# Altium PCB DVD.PcbDoc (part 2 of 2)
Units mm, origin at the board's own origin, x right, y up, seen from the top; angles counter-clockwise.
Board outline 60 x 90 mm, 2 copper layers (Top Layer, Bottom Layer), stack 1.671 mm thick; 69 components, 43 nets, 255 pads, 31 vias.
Unrouted connection lines stored in the file: 70.
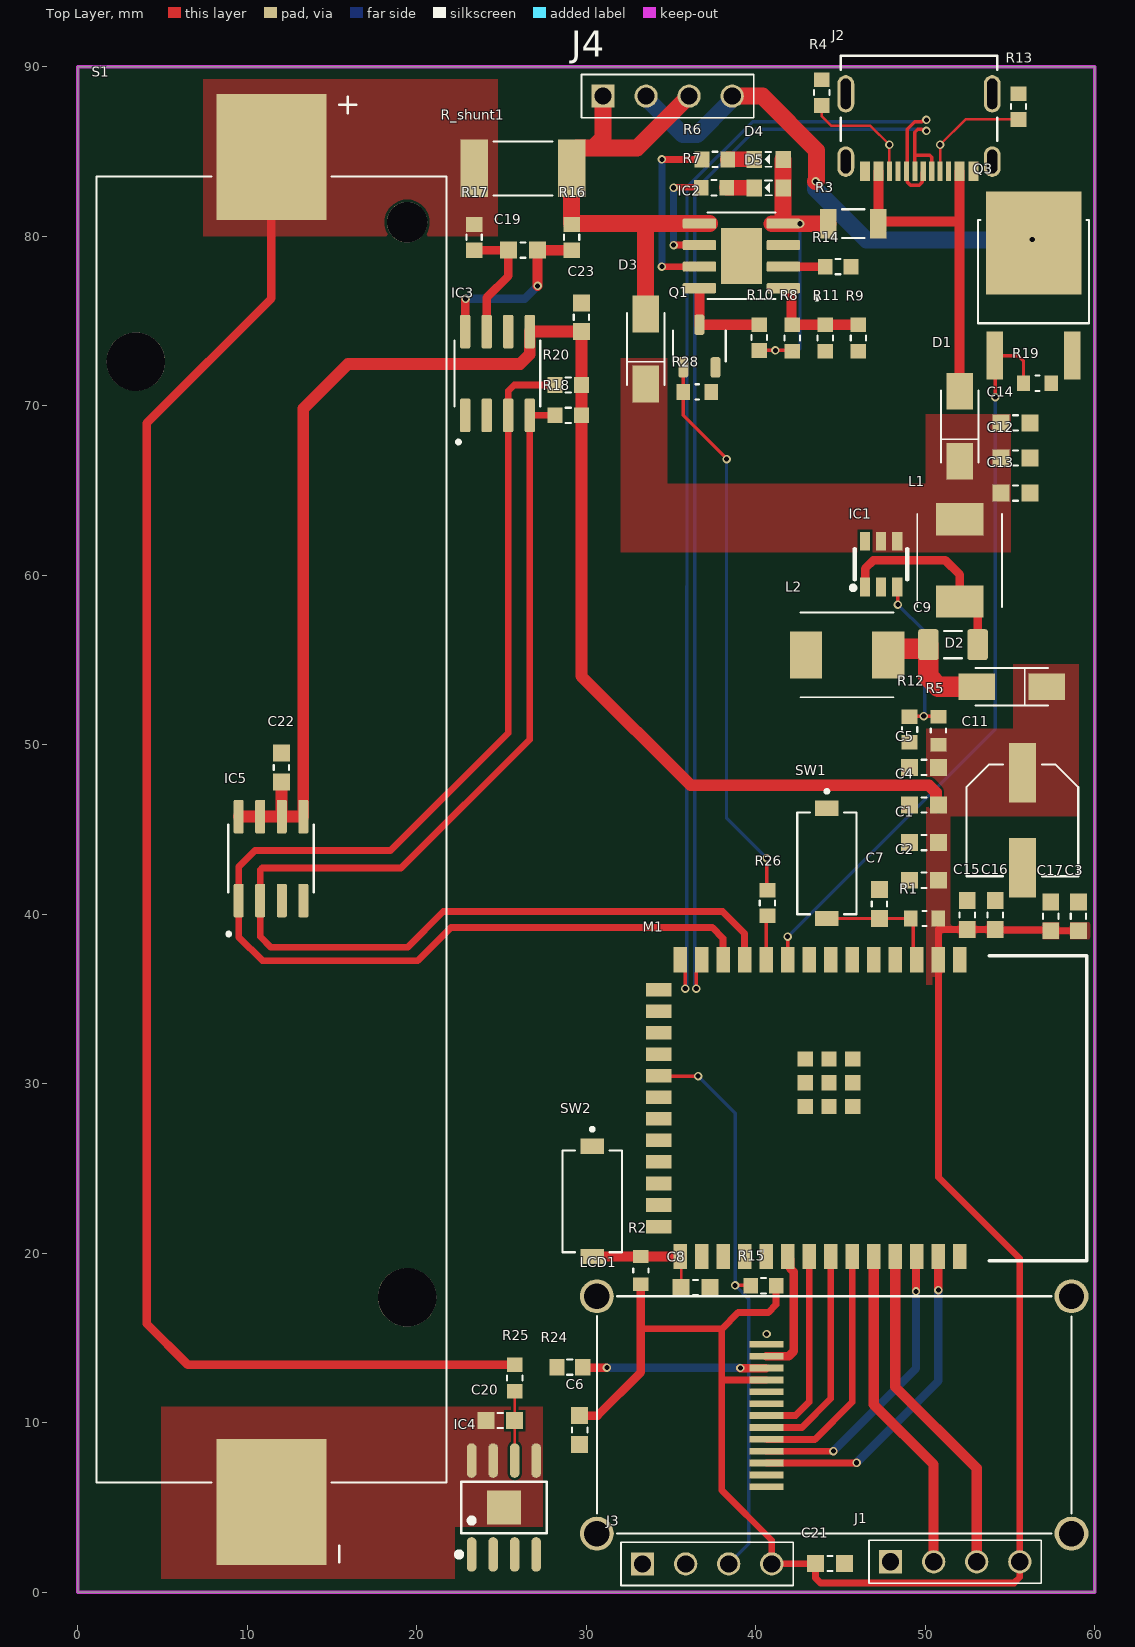
[diagram p0: Top Layer view]

## Part data (continued)
IC5: library part LM75BIM-5+, "Serial Switch/Digital Sensor, 9 Bit(s), 3Cel, CMOS, Rectangular, 8 Pin, Surface Mount", Case/Package=SOIC, Manufacturer="Analog Devices", Manufacturer Lifecycle Status=PRODUCTION, Max Operating Temperature=125°C, Max Power Dissipation=362mW, Max Supply Voltage (DC)=5.5V, Min Operating Temperature=-55°C, Min Supply Voltage (DC)=3V, Operating Supply Current=250µA, Supplier Part Number=LM75BIM-5+-ND, Category="Analog to Digital Converters (ADCs)", ComponentLink1Description=https://octopart.com:443/opatz8j6/c1?t=YplwzHpL-JJLZ_2PRGZZpt756W2xclSjhqXVdEI1uhJ8_WWjbW7-qgeHxwwe1SMULagSLc6USHzl8XuhBHjwSqYk79nBn7LCkVwL1rbbeliDkJ86ulnC6U38m-iQo5pASL4W__81O9e-gp7BJ4jJNYdroiH1YY2DGBMiO5DTDljEwD1jx41NO8_GGUihyPQS3uA_NDDyM9lvT6sjnkswLspbyI9HgaQ2_Ebdp7nvrIldeSGWyNMVZ3D6ks0QZS_VIIbeN8gOxfe-OAINvbqiAbKFlkIsyC7EpES6idiquEIaQjTaF9N-&src-supplier=Analog+Devices, ComponentLink1URL=https://octopart.com:443/opatz8j6/c1?t=YplwzHpL-JJLZ_2PRGZZpt756W2xclSjhqXVdEI1uhJ8_WWjbW7-qgeHxwwe1SMULagSLc6USHzl8XuhBHjwSqYk79nBn7LCkVwL1rbbeliDkJ86ulnC6U38m-iQo5pASL4W__81O9e-gp7BJ4jJNYdroiH1YY2DGBMiO5DTDljEwD1jx41NO8_GGUihyPQS3uA_NDDyM9lvT6sjnkswLspbyI9HgaQ2_Ebdp7nvrIldeSGWyNMVZ3D6ks0QZS_VIIbeN8gOxfe-OAINvbqiAbKFlkIsyC7EpES6idiquEIaQjTaF9N-&src-supplier=Analog+Devices, ComponentLink2Description=https://datasheet.octopart.com:443/LM75BIM-5%2B-Analog-Devices-datasheet-13733767.pdf?src-supplier=Ciiva, ComponentLink2URL=https://datasheet.octopart.com:443/LM75BIM-5%2B-Analog-Devices-datasheet-13733767.pdf?src-supplier=Ciiva, ComponentLink3Description=https://datasheet.octopart.com:443/LM75BIM-5%2B-Maxim-Integrated-datasheet-15933229.pdf?src-supplier=iiiC, ComponentLink3URL=https://datasheet.octopart.com:443/LM75BIM-5%2B-Maxim-Integrated-datasheet-15933229.pdf?src-supplier=iiiC, ComponentLink4Description=http://sigma.octopart.com:80/conflict_mineral_statement/Analog-Devices-company-33.pdf?src-supplier=Compliance+Statements, ComponentLink4URL=http://sigma.octopart.com:80/conflict_mineral_statement/Analog-Devices-company-33.pdf?src-supplier=Compliance+Statements, ComponentLink5Description=http://sigma.octopart.com:80/conflict_mineral_statement/Maxim-Integrated-company-65.pdf?src-supplier=Compliance+Statements, ComponentLink5URL=http://sigma.octopart.com:80/conflict_mineral_statement/Maxim-Integrated-company-65.pdf?src-supplier=Compliance+Statements, ComponentLink6Description=http://sigma.octopart.com:80/rohs_statement/Maxim-Integrated-company-66.pdf?src-supplier=Compliance+Statements, ComponentLink6URL=http://sigma.octopart.com:80/rohs_statement/Maxim-Integrated-company-66.pdf?src-supplier=Compliance+Statements, ComponentLink7Description=http://sigma.octopart.com:80/reach_statement/Maxim-Integrated-company-67.pdf?src-supplier=Compliance+Statements, ComponentLink7URL=http://sigma.octopart.com:80/reach_statement/Maxim-Integrated-company-67.pdf?src-supplier=Compliance+Statements, ComponentLink8Description=https://octopart.com:443/opatz8j6/c1?t=ANtBRCTaBdtvFyyuZNnEn44Ck4f0UNpo50vn_fQhfGrZ59IDdhfu2ipHRvQpLfcdo1pyCKCFJPWk8CxqPV5Go2Xy1MfrovsCR3DXvT7Gfy6JiDcwYz5R0lqVBT-d2HzchyXqrl0saZY6dsynHRKtZ8QolJYoY7wiWroMt77lbe_02i5Y6VAS4-QMQDFKJbGEtMk7trPgfBWZ1D3DU1KUo3jjNBd1KbG_03mihrdCH2VC6x6bVQtR-W63Ky_GYcKqaIEub4rG6TBSiLYzydBblAOC-QtCYgUJ-e1WKK81SMDSa7kogVs_&src-supplier=Compliance+Statements, ComponentLink8URL=https://octopart.com:443/opatz8j6/c1?t=ANtBRCTaBdtvFyyuZNnEn44Ck4f0UNpo50vn_fQhfGrZ59IDdhfu2ipHRvQpLfcdo1pyCKCFJPWk8CxqPV5Go2Xy1MfrovsCR3DXvT7Gfy6JiDcwYz5R0lqVBT-d2HzchyXqrl0saZY6dsynHRKtZ8QolJYoY7wiWroMt77lbe_02i5Y6VAS4-QMQDFKJbGEtMk7trPgfBWZ1D3DU1KUo3jjNBd1KbG_03mihrdCH2VC6x6bVQtR-W63Ky_GYcKqaIEub4rG6TBSiLYzydBblAOC-QtCYgUJ-e1WKK81SMDSa7kogVs_&src-supplier=Compliance+Statements, Interface="2-Wire, I2C, SMBus, Serial", Lifecycle Status=Production, Manufacturer Part Number=LM75BIM-5+, Mounting Technology="Surface Mount", Operating Supply Voltage=5.5V, Output Type="Digital, I2C", Pins=8, Pricing="1=2.67, 5=2.382, 10=2.274, 25=2.1452, 50=2.057, 100=1.9762, 500=1.81372, 1000=1.75322, 5000=1.63137 (USD)", Radiation Hardening=No, Resolution=1.125B, RoHS=Compliant, Stock=277, Supplier=DigiKey
J1 J3 J4: library part "HEADER; 4PIN; 2.54; VER; TSW-104-14-L-S", "Conn Unshrouded Header HDR 4 POS 2.54mm Solder ST Thru-Hole Automotive Bulk", Manufacturer=Samtec, Manufacturer Part Number=TSW-104-14-L-S, Supplier Part Number=SAM1055-04-ND, Category=Connectors, ComponentLink1Description=https://datasheet.ciiva.com/25618/0900766b81154476-25618487.pdf?src-supplier=Rs, ComponentLink1URL=https://datasheet.ciiva.com/25618/0900766b81154476-25618487.pdf?src-supplier=Rs, ComponentLink2Description=https://datasheet.ciiva.com/10190/htsw-th-10190703.pdf?src-supplier=Avnet, ComponentLink2URL=https://datasheet.ciiva.com/10190/htsw-th-10190703.pdf?src-supplier=Avnet, ComponentLink3Description="Link Digikey", ComponentLink3URL=https://www.digikey.com/en/products/detail/samtec-inc/TSW-104-14-L-S/1102620, Designer=TVBac, Pricing="1=0.43, 10=0.377, 100=0.3107, 500=0.2702, 1000=0.22291, 5000=0.19589, 10000=0.18238 (USD)", RoHS=Yes, Stock=1246, Supplier=Digikey
J2: library part "Type-C; USB; HOR; RECEPTACLE;  24PIN; 217179-0001", "USB Connector, 16 Contact(s), Female, Right Angle, Surface Mount Terminal, Locking, Receptacle", Current Rating=1.25A, Manufacturer=Molex, Manufacturer Part Number=217179-0001, Max Operating Temperature=85°C, Min Operating Temperature=-40°C, Supplier Part Number=35AJ1973, Voltage Rating=30V, Category=Connectors, ComponentLink1Description="Link Digikey", ComponentLink1URL=https://www.digikey.com/en/products/detail/molex/2171790001/13913749, Contact Material=Nickel,Gold, Designer=TVBac, Gender=Receptacle, Height=3.36mm, Number of Contacts=16, Pricing="1=1.02, 25=0.853, 100=0.722, 250=0.677, 500=0.631 (USD)", RoHS=No, Stock=7200, Supplier=Avnet, USB Standard="USB 2.0"
L1 L2: library part "IND; 2.2uH; SMD; 6.3A; ETQ-P3M2R2KVP", "Ind Power Shielded Wirewound 2.2uH 20% 100KHz Metal 6.3A (5.5 X 5 X 3mm) Emboss T/R", Case/Package=SMD/SMT, DC Resistance (DCR)=22mR, Inductance Tolerance=20%, Manufacturer=Panasonic, Manufacturer Part Number=ETQ-P3M2R2KVP, Max Operating Temperature=155°C, Min Operating Temperature=-55°C, Ratings=AEC-Q200, RMS Current (Irms)=5.2A, Saturation Current=10.1A, Supplier Part Number=P19759CT-ND, Test Frequency=100kHz, Category="Fixed Inductors", ComponentLink1Description=http://www.farnell.com/datasheets/2820815.pdf?src-supplier=Farnell, ComponentLink1URL=http://www.farnell.com/datasheets/2820815.pdf?src-supplier=Farnell, ComponentLink2Description=https://industrial.panasonic.com/cdbs/www-data/pdf/AGL0000/AGL0000C63.pdf?src-supplier=Digikey, ComponentLink2URL=https://industrial.panasonic.com/cdbs/www-data/pdf/AGL0000/AGL0000C63.pdf?src-supplier=Digikey, ComponentLink3Description=http://www.farnell.com/datasheets/2820815.pdf?src-supplier=Newark, ComponentLink3URL=http://www.farnell.com/datasheets/2820815.pdf?src-supplier=Newark, ComponentLink4Description=https://datasheet.octopart.com/ETQP3M2R2KVP-Panasonic-datasheet-98950113.pdf?src-supplier=Newark, ComponentLink4URL=https://datasheet.octopart.com/ETQP3M2R2KVP-Panasonic-datasheet-98950113.pdf?src-supplier=Newark, ComponentLink5Description=http://www.farnell.com/datasheets/2144948.pdf?src-supplier=Element14, ComponentLink5URL=http://www.farnell.com/datasheets/2144948.pdf?src-supplier=Element14, ComponentLink6Description=https://datasheet.octopart.com/ETQP3M2R2KVP-Panasonic-datasheet-65850535.pdf?src-supplier=Future+Electronics, ComponentLink6URL=https://datasheet.octopart.com/ETQP3M2R2KVP-Panasonic-datasheet-65850535.pdf?src-supplier=Future+Electronics, ComponentLink7Description=https://datasheet.octopart.com/ETQP3M2R2KVP-Panasonic-datasheet-137675050.pdf?src-supplier=TME, ComponentLink7URL=https://datasheet.octopart.com/ETQP3M2R2KVP-Panasonic-datasheet-137675050.pdf?src-supplier=TME, ComponentLink8Description="Link Digikey", ComponentLink8URL=https://www.digikey.com/en/products/detail/panasonic-electronic-components/ETQ-P3M2R2KVP/6134777, Core Material=Metal,Composite, Designer=TVBac, Mounting Technology="Surface Mount", Packaging="Cut Tape", Pricing="1=0.89, 10=0.752, 25=0.6836, 50=0.6426, 100=0.5333, 250=0.49224, 500=0.4649, 1000=0.42387 (USD)", Reach SVHC Compliant=Unknown, RoHS=Yes, RoHS Compliant=Yes, Series=PCC-M0530M, Shielding=Shielded, Stock=6203, Supplier=Digikey, Tolerance=20%
LCD1: library part "LCD; ST7735; 0.96Inch;"
M1: library part "ESP32-S3-WROOM-1-N16R8; SMD;", "SMD mod, ESP32-S3R8 with 3.3V, 8MB Octal PSRAM die insid, 6MBQuad SPI flash, pcb ant", Manufacturer="Espressif Systems", Manufacturer Part Number=ESP32-S3-WROOM-1-N16R8, Supplier Part Number=1965-ESP32-S3-WROOM-1-N16R8CT-ND, Category=LDO, ComponentLink1Description="Link Digikey", ComponentLink1URL=https://www.digikey.com/en/products/detail/espressif-systems/ESP32-S3-WROOM-1-N16R8/16162642, Designer=TVBac, Pricing="1=3.9 (USD)", RoHS=No, Stock=8003, Supplier=Digikey
Q1: library part "SMD; AO3400A; MOSFET; N-CH;", "Trans MOSFET N-CH 30V 5.7A 3-Pin SOT-23", Case/Package=TO-236-3, Continuous Drain Current (ID)=5.7A, Drain to Source Breakdown Voltage=30V, Drain to Source Resistance=18mR, Input Capacitance=630pF, Manufacturer="Alpha & Omega Semiconductor", Manufacturer Part Number=AO3400A, Max Operating Temperature=150°C, Max Power Dissipation=1.4W, Min Operating Temperature=-55°C, Package=SOT23-3, Supplier Part Number=785-1000-1-ND, Threshold Voltage=650mV, Category=MOSFETs, ComponentLink1Description=https://datasheet.ciiva.com/940/ao3400a-940739.pdf?src-supplier=Digikey, ComponentLink1URL=https://datasheet.ciiva.com/940/ao3400a-940739.pdf?src-supplier=Digikey, ComponentLink2Description=https://datasheet.ciiva.com/26906/getdatasheetpartid-64438-26906526.pdf?src-supplier=Verical, ComponentLink2URL=https://datasheet.ciiva.com/26906/getdatasheetpartid-64438-26906526.pdf?src-supplier=Verical, ComponentLink3Description=https://datasheet.ciiva.com/940/ao3400a-940740.pdf?src-supplier=Digikey, ComponentLink3URL=https://datasheet.ciiva.com/940/ao3400a-940740.pdf?src-supplier=Digikey, ComponentLink4Description=https://datasheet.ciiva.com/940/ao3400a-940741.pdf?src-supplier=Digikey, ComponentLink4URL=https://datasheet.ciiva.com/940/ao3400a-940741.pdf?src-supplier=Digikey, Drain to Source Voltage (Vdss)=30V, Height=1.25mm, Lead Free="Lead Free", Mounting Technology="Surface Mount", Number of Channels=1, Packaging="Cut Tape", Pricing="1=0.46, 10=0.282, 100=0.1787, 500=0.1337, 1000=0.11915 (USD)", Rds On Max=26.5mR, RoHS=Yes, RoHS Compliant=Yes, Series=-, Stock=457949, Supplier=Digikey, Turn-Off Delay Time=25ns, Turn-On Delay Time=3ns
Q3: library part "SMD; AOD442; MOSFET; N-CH;", "Trans MOSFET N-CH 60V 37A 3-Pin(2+Tab) DPAK", Manufacturer="Alpha & Omega Semiconductor", Manufacturer Part Number=AOD442, Supplier Part Number=785-1107-1-ND, Category=MOSFETs, ComponentLink1Description=https://datasheet.ciiva.com/6384/aod442-6384657.pdf?src-supplier=Digikey, ComponentLink1URL=https://datasheet.ciiva.com/6384/aod442-6384657.pdf?src-supplier=Digikey, ComponentLink2Description=https://datasheet.ciiva.com/6384/aod442-6384654.pdf?src-supplier=Digikey, ComponentLink2URL=https://datasheet.ciiva.com/6384/aod442-6384654.pdf?src-supplier=Digikey, ComponentLink3Description=https://datasheet.ciiva.com/6384/aod442-6384651.pdf?src-supplier=Digikey, ComponentLink3URL=https://datasheet.ciiva.com/6384/aod442-6384651.pdf?src-supplier=Digikey, ComponentLink4Description="Link Digikey", ComponentLink4URL=https://www.digikey.kr/en/products/detail/alpha-omega-semiconductor-inc/AOD442/1855879, Designer=TVBac, Pricing="1=0.52, 10=0.448, 100=0.3099, 500=0.25896, 1000=0.2425 (USD)", RoHS=Yes, Stock=335544, Supplier=Digikey
R1 R2 R5 R19 R28: library part "RES; 10K; 0603; SMD; RC0603FR-0710KL", "SMD Chip Resistor, 10 Kohm, ½ 1%, 100 Mw, 0603 [1608 Metric], Thick Film, General Purpose", Case Code (Imperial)=0603, Case Code (Metric)=1608, Manufacturer=Yageo, Manufacturer Part Number=RC0603FR-0710KL, Max Operating Temperature=155°C, Max Power Dissipation=100mW, Min Operating Temperature=-55°C, Resistance Tolerance=1%, Resistor Type="Thick Film", Supplier Part Number=4023214, Temperature Coefficient=100ppm/°C, Voltage Rating=75V, Voltage Rating (DC)=50V, Case/Package=0603, Category="Chip SMD Resistors", Construction=Rectangular, Depth=0.8mm, Features="Moisture Resistant", Height=0.45mm, Lead Free=5697LeadFree, Lead Pitch=0.3mm, Length=1.6mm, Military Standard=Not, Number of Terminations=2, Package=0603, Packaging="Tape and Reel", Pins=2, Power Rating=100mW, Pricing="5000=0.0019, 20000=0.0018, 25000=0.0012, 50000=0.0018, 125000=0.0017, 200000=0.0016, 250000=0.0011, 750000=0.001 (USD)", Reach SVHC Compliant=No, RoHS=Yes, RoHS Compliant=Yes, Series=RC, Stock=60200000, Supplier="Future Electronics", Termination=SMD/SMT, Tolerance=1%, Weight=7.1E-05oz, Width=0.8mm
R3: library part "RES; 0.1R; 1206; SMD; RL1206JR-070R1L", "SMD Chip Resistor, 100 MOhm, ± 5%, 250 mW, 1206 [3216 Metric], Thick Film, Low Ohmic", Manufacturer=Yageo, Manufacturer Part Number=RL1206JR-070R1L, Package=1206, Supplier Part Number=1607514, Category="Chip SMD Resistors", ComponentLink1Description=https://datasheet.ciiva.com/8083/pyu-rl-521-rohs-l-5-8083925.pdf?src-supplier=Avnet, ComponentLink1URL=https://datasheet.ciiva.com/8083/pyu-rl-521-rohs-l-5-8083925.pdf?src-supplier=Avnet, ComponentLink2Description=https://datasheet.ciiva.com/5558/pyu-rl-hp-521-rohs-l-2-5558220.pdf?src-supplier=Mouser, ComponentLink2URL=https://datasheet.ciiva.com/5558/pyu-rl-hp-521-rohs-l-2-5558220.pdf?src-supplier=Mouser, Pricing="5000=0.0122, 10000=0.012, 15000=0.0119, 25000=0.0117, 50000=0.0114 (USD)", RoHS=Yes, Stock=195000, Supplier="Future Electronics"
R4 R13 R15: library part "RES; 5.1K; 0603; SMD; RMCF0603FT5K10", "Res Thick Film 0603 5.1K Ohm 1% 0.1W(1/10W) ±100ppm/C Pad SMD T/R Automotive AEC-Q200", Case Code (Imperial)=0603, Case Code (Metric)=1608, Manufacturer="Stackpole Electronics", Manufacturer Part Number=RMCF0603FT5K10, Max Operating Temperature=155°C, Max Power Dissipation=100mW, Min Operating Temperature=-55°C, Supplier Part Number=RMCF0603FT5K10CT-ND, Temperature Coefficient=100ppm/°C, Tolerance=1%, Voltage Rating=75V, Case/Package=0603, Category="Chip SMD Resistors", ComponentLink1Description=http://components.arrow.com/part/dataview/50863347S9465827N1174?src-supplier=Arrow+Electronics, ComponentLink1URL=http://components.arrow.com/part/dataview/50863347S9465827N1174?src-supplier=Arrow+Electronics, ComponentLink2Description=https://www.seielect.com/catalog/SEI-Packaging.pdf?src-supplier=Digikey, ComponentLink2URL=https://www.seielect.com/catalog/SEI-Packaging.pdf?src-supplier=Digikey, ComponentLink3Description=https://www.seielect.com/catalog/SEI-RMCF_RMCP.pdf?src-supplier=Avnet, ComponentLink3URL=https://www.seielect.com/catalog/SEI-RMCF_RMCP.pdf?src-supplier=Avnet, Contact Plating=Tin,Matte, Features="Automotive AEC-Q200", Height=0.022inch, Length=0.061inch, Mounting Technology="Surface Mount", Number of Terminations=2, Package=0603, Packaging="Tape and Reel", Pricing="1=0.1, 10=0.02, 100=0.0091, 1000=0.0048, 2500=0.00386 (USD)", Radiation Hardening=No, RoHS=Yes, RoHS Compliant=Yes, Series=RMCF, Stock=751079, Supplier=Digikey, Width=0.031inch
R6 R7 R10 R14: library part "RES; 1K; 0603; SMD; ESR03EZPF1001", "SMD Chip Resistor, 1 kOhm, ± 1%, 250 mW, 0603 [1608 Metric], Thick Film, Anti-Surge", Manufacturer=Rohm, Manufacturer Part Number=ESR03EZPF1001, Package=0603, Supplier Part Number=RHM1.00KADCT-ND, Voltage Rating=150V, Category="Chip SMD Resistors", ComponentLink1Description=https://datasheet.ciiva.com/2469/esr-2469712.pdf?src-supplier=Digikey, ComponentLink1URL=https://datasheet.ciiva.com/2469/esr-2469712.pdf?src-supplier=Digikey, ComponentLink2Description=https://datasheet.ciiva.com/2469/esr-2469713.pdf?src-supplier=Digikey, ComponentLink2URL=https://datasheet.ciiva.com/2469/esr-2469713.pdf?src-supplier=Digikey, ComponentLink3Description=https://datasheet.ciiva.com/2469/esr-2469714.pdf?src-supplier=Digikey, ComponentLink3URL=https://datasheet.ciiva.com/2469/esr-2469714.pdf?src-supplier=Digikey, ComponentLink4Description="Link Digikey", ComponentLink4URL=https://www.digikey.com/en/products/detail/rohm-semiconductor/ESR03EZPF1001/1983428, Designer=TVBac, Lead Free=5697LeadFree, Pricing="1=0.11, 10=0.055, 50=0.0364, 100=0.0309, 500=0.02206, 1000=0.01943 (USD)", RoHS=Yes, Stock=2703233, Supplier=Digikey, Voltage Rating (DC)=150V
R8 R9 R11: library part "RES; 0.5R; 0603; SMD; UCR03EVPFLR510", "Res Thick Film 0603 0.51 Ohm 1% 0.2W(1/5W) 0ppm/C to 150ppm/C Pad SMD T/R Automotive AEC-Q200", Case Code (Imperial)=0603, Case Code (Metric)=1608, Manufacturer=Rohm, Manufacturer Part Number=UCR03EVPFLR510, Max Operating Temperature=155°C, Max Power Dissipation=200mW, Min Operating Temperature=-55°C, Ratings=AEC-Q200, Supplier Part Number=755-UCR03EVPFLR510, Temperature Coefficient=150ppm/°C, Tolerance=1%, Case/Package=0603, Category="Chip SMD Resistors", ComponentLink1Description=https://datasheet.ciiva.com/14926/ucr-14926334.pdf?src-supplier=Digikey, ComponentLink1URL=https://datasheet.ciiva.com/14926/ucr-14926334.pdf?src-supplier=Digikey, ComponentLink2Description=https://datasheet.ciiva.com/14927/ucr-14927064.pdf?src-supplier=Digikey, ComponentLink2URL=https://datasheet.ciiva.com/14927/ucr-14927064.pdf?src-supplier=Digikey, ComponentLink3Description="Link Digikey", ComponentLink3URL=https://www.digikey.com/en/products/detail/rohm-semiconductor/UCR03EVPFLR510/4053600, Designer=TVBac, Features="Automotive AEC-Q200", Lead Free="Lead Free", Number of Terminations=2, Package=0603, Packaging="Cut Tape", Pricing="1=0.63, 10=0.319, 50=0.319, 100=0.229, 1000=0.153, 10000=0.136 (USD)", RoHS=Yes, RoHS Compliant=Yes, Series=UCR, Stock=9265, Supplier=Mouser
R12: library part "RES; 2.2K; SMD; 0603; RMCF0603FT2K20", "Res Thick Film 0603 2.2K Ohm 1% 0.1W(1/10W) ±100ppm/C Pad SMD Automotive T/R", Case Code (Imperial)=0603, Case Code (Metric)=1608, Manufacturer="Stackpole Electronics", Manufacturer Part Number=RMCF0603FT2K20, Max Operating Temperature=155°C, Max Power Dissipation=100mW, Min Operating Temperature=-55°C, Ratings=AEC-Q200, Supplier Part Number=RMCF0603FT2K20CT-ND, Temperature Coefficient=100ppm/°C, Tolerance=1%, Voltage Rating=75V, Case/Package=0603, Category="Chip SMD Resistors", ComponentLink1Description=http://components.arrow.com/part/dataview/46931077S7088098N1174?src-supplier=Arrow+Electronics, ComponentLink1URL=http://components.arrow.com/part/dataview/46931077S7088098N1174?src-supplier=Arrow+Electronics, ComponentLink2Description=https://datasheet.octopart.com/RMCF0603FT2K20-Stackpole-Electronics-datasheet-11547379.pdf?src-supplier=Future+Electronics, ComponentLink2URL=https://datasheet.octopart.com/RMCF0603FT2K20-Stackpole-Electronics-datasheet-11547379.pdf?src-supplier=Future+Electronics, ComponentLink3Description=https://www.seielect.com/catalog/SEI-RMCF_RMCP.pdf?src-supplier=Avnet, ComponentLink3URL=https://www.seielect.com/catalog/SEI-RMCF_RMCP.pdf?src-supplier=Avnet, ComponentLink4Description=http://www.seielect.com/Catalog/SEI-rmc.pdf?src-supplier=Future+Electronics, ComponentLink4URL=http://www.seielect.com/Catalog/SEI-rmc.pdf?src-supplier=Future+Electronics, ComponentLink5Description=https://www.seielect.com/catalog/SEI-Packaging.pdf?src-supplier=Digikey, ComponentLink5URL=https://www.seielect.com/catalog/SEI-Packaging.pdf?src-supplier=Digikey, ComponentLink6Description="Link Digikey", ComponentLink6URL=https://www.digikey.com/en/products/detail/stackpole-electronics-inc/RMCF0603FT2K20/1760987, Contact Plating=Tin,Matte, Designer=TVBac, Features="Automotive AEC-Q200", Height=0.022inch, Lead Free="Lead Free", Length=0.061inch, Mounting Technology="Surface Mount", Number of Terminations=2, Package=0603, Packaging="Tape and Reel", Power Rating=100mW, Pricing="1=0.1, 10=0.015, 50=0.0092, 100=0.0075, 500=0.0049, 1000=0.00415 (USD)", Radiation Hardening=No, RoHS=Yes, RoHS Compliant=Yes, Series=RMCF, Stock=496567, Supplier=Digikey, Width=0.031inch
R16 R17 R24: library part "RES; 10R; SMD; 0603; RMCF0603FT10R0", "SMD Chip Resistor, 100 kOhm, ± 1%, 100 mW, 0603 [1608 Metric], Thick Film, General Purpose", Case Code (Imperial)=0603, Case Code (Metric)=1608, Manufacturer="Stackpole Electronics", Manufacturer Part Number=RMCF0603FT10R0, Max Operating Temperature=155°C, Max Power Dissipation=100mW, Min Operating Temperature=-55°C, Supplier Part Number=RMCF0603FT10R0CT-ND, Temperature Coefficient=100ppm/°C, Tolerance=1%, Voltage Rating=75V, Case/Package=0603, Category="Chip SMD Resistors", ComponentLink1Description=http://components.arrow.com/part/dataview/44988319S6756893N1174?src-supplier=Arrow+Electronics, ComponentLink1URL=http://components.arrow.com/part/dataview/44988319S6756893N1174?src-supplier=Arrow+Electronics, ComponentLink2Description=https://www.seielect.com/catalog/SEI-RMCF_RMCP.pdf?src-supplier=Avnet, ComponentLink2URL=https://www.seielect.com/catalog/SEI-RMCF_RMCP.pdf?src-supplier=Avnet, ComponentLink3Description=https://www.verical.com/server-webapp/html/getDatasheet?partID=372827&src-supplier=Verical, ComponentLink3URL=https://www.verical.com/server-webapp/html/getDatasheet?partID=372827&src-supplier=Verical, ComponentLink4Description=https://www.seielect.com/catalog/SEI-Packaging.pdf?src-supplier=Digikey, ComponentLink4URL=https://www.seielect.com/catalog/SEI-Packaging.pdf?src-supplier=Digikey, Construction=Rectangular, Contact Plating=Tin,Matte, Depth=0.8mm, Designer=TVBac, Features="Automotive AEC-Q200", Height=0.022inch, Length=1.55mm, Military Standard=Not, Mounting Technology="Surface Mount", Number of Terminations=2, Package=0603, Packaging="Tape and Reel", Pricing="1=0.1, 10=0.015, 50=0.009, 100=0.0075, 500=0.00498, 1000=0.00425 (USD)", Radiation Hardening=No, RoHS=Yes, RoHS Compliant=Yes, Series=RMCF, Stock=1228366, Supplier=Digikey, Width=0.031inch
R18 R20: library part "RES; 4.7K; 0603; SMD; SFR03EZPF4701", "Res Anti-Sulfured Thick Film 0603 4.7k Ohm 1% 1/10W ±100ppm/°C Molded Paper T/R", Manufacturer=Rohm, Manufacturer Part Number=SFR03EZPF4701, Package=0603, Power Rating=100mW, Supplier Part Number=755-SFR03EZPF4701, Voltage Rating (DC)=50V, Category="Chip SMD Resistors", ComponentLink1Description=http://www.farnell.com/datasheets/2611943.pdf?src-supplier=Farnell, ComponentLink1URL=http://www.farnell.com/datasheets/2611943.pdf?src-supplier=Farnell, ComponentLink2Description=http://www.farnell.com/datasheets/2611943.pdf?src-supplier=Newark, ComponentLink2URL=http://www.farnell.com/datasheets/2611943.pdf?src-supplier=Newark, ComponentLink3Description=http://www.farnell.com/datasheets/2611943.pdf?src-supplier=Element14, ComponentLink3URL=http://www.farnell.com/datasheets/2611943.pdf?src-supplier=Element14, ComponentLink4Description=https://www.rohm.com/datasheet/SFR03EZPF/sfr-e?src-supplier=Digikey, ComponentLink4URL=https://www.rohm.com/datasheet/SFR03EZPF/sfr-e?src-supplier=Digikey, ComponentLink5Description="Link Digikey", ComponentLink5URL=https://www.digikey.com/en/products/detail/rohm-semiconductor/SFR03EZPF4701/9771855, Designer=TVBac, Pricing="1=0.14, 10=0.045, 50=0.045, 100=0.027, 1000=0.02, 10000=0.014 (USD)", RoHS=Yes, Stock=30180, Supplier=Mouser
R25: library part "RES; 100R; 0603; SMD; KTR03EZPF1000", "Res Thick Film 0603 100 Ohm 1% 0.1W(1/10W) ±100ppm/C Pad SMD T/R Automotive AEC-Q200", Case Code (Imperial)=0603, Case Code (Metric)=1608, Manufacturer=Rohm, Manufacturer Part Number=KTR03EZPF1000, Max Operating Temperature=155°C, Max Power Dissipation=100mW, Min Operating Temperature=-55°C, Ratings=AEC-Q200, Supplier Part Number=755-KTR03EZPF1000, Temperature Coefficient=100ppm/°C, Tolerance=1%, Voltage Rating=350V, Case/Package=0603, Category="Chip SMD Resistors", ComponentLink1Description=https://datasheet.ciiva.com/14926/ktr-14926472.pdf?src-supplier=Digikey, ComponentLink1URL=https://datasheet.ciiva.com/14926/ktr-14926472.pdf?src-supplier=Digikey, ComponentLink2Description=https://datasheet.ciiva.com/14932/ktr-14932133.pdf?src-supplier=Digikey, ComponentLink2URL=https://datasheet.ciiva.com/14932/ktr-14932133.pdf?src-supplier=Digikey, ComponentLink3Description="Link Digikey", ComponentLink3URL=https://www.digikey.com/en/products/detail/rohm-semiconductor/KTR03EZPF1000/4051558, Designer=TVBac, Features="Automotive AEC-Q200", Number of Terminations=2, Package=0603, Packaging="Cut Tape", Pricing="1=0.12, 10=0.039, 50=0.039, 100=0.024, 1000=0.021, 10000=0.015 (USD)", RoHS=Yes, RoHS Compliant=Yes, Series=KTR, Stock=66325, Supplier=Mouser, Voltage Rating (DC)=350V
R26: library part "RES; 0R; 0603; SMD;  RMCF0603ZT0R00", "Res Thick 0603 0 Ohm Jumper 1/10W 100Ppm/ C Smd Rohs Compliant: Yes", Case Code (Imperial)=0603, Case Code (Metric)=1608, Manufacturer="Stackpole Electronics", Manufacturer Part Number=RMCF0603ZT0R00, Max Operating Temperature=155°C, Max Power Dissipation=100mW, Min Operating Temperature=-55°C, Supplier Part Number=RMCF0603ZT0R00CT-ND, Voltage Rating=75V, Case/Package=0603, Category="Chip SMD Resistors", ComponentLink1Description=https://datasheet.octopart.com/RMCF0603ZT0R00-Stackpole-Electronics-datasheet-11547379.pdf?src-supplier=Future+Electronics, ComponentLink1URL=https://datasheet.octopart.com/RMCF0603ZT0R00-Stackpole-Electronics-datasheet-11547379.pdf?src-supplier=Future+Electronics, ComponentLink2Description=https://www.seielect.com/catalog/SEI-Packaging.pdf?src-supplier=Avnet, ComponentLink2URL=https://www.seielect.com/catalog/SEI-Packaging.pdf?src-supplier=Avnet, ComponentLink3Description=https://www.seielect.com/catalog/SEI-Packaging.pdf?src-supplier=Arrow+Electronics, ComponentLink3URL=https://www.seielect.com/catalog/SEI-Packaging.pdf?src-supplier=Arrow+Electronics, ComponentLink4Description=https://www.seielect.com/catalog/SEI-Packaging.pdf?src-supplier=Verical, ComponentLink4URL=https://www.seielect.com/catalog/SEI-Packaging.pdf?src-supplier=Verical, ComponentLink5Description=https://www.seielect.com/Catalog/SEI-RMCF_RMCP.pdf?src-supplier=Digikey, ComponentLink5URL=https://www.seielect.com/Catalog/SEI-RMCF_RMCP.pdf?src-supplier=Digikey, ComponentLink6Description=https://www.seielect.com/catalog/SEI-Packaging.pdf?src-supplier=Digikey, ComponentLink6URL=https://www.seielect.com/catalog/SEI-Packaging.pdf?src-supplier=Digikey, ComponentLink7Description=https://datasheet.octopart.com/RMCF0603ZT0R00-Stackpole-Electronics-datasheet-154799224.pdf?src-supplier=Master+Electronics, ComponentLink7URL=https://datasheet.octopart.com/RMCF0603ZT0R00-Stackpole-Electronics-datasheet-154799224.pdf?src-supplier=Master+Electronics, ComponentLink8Description="Link Digikey", ComponentLink8URL=https://www.digikey.com/en/products/detail/stackpole-electronics-inc/RMCF0603ZT0R00/1756908, Construction=Rectangular, Contact Plating=Tin,Matte, Depth=0.8mm, Designer=TVBac, Features="Automotive AEC-Q200", Height=0.022inch, Lead Free=5697LeadFree, Length=1.55mm, Military Standard=Not, Mounting Technology="Surface Mount", Number of Terminations=2, Package=0603, Packaging="Tape and Reel", Pricing="1=0.1, 10=0.013, 25=0.0096, 50=0.0072, 100=0.0051, 250=0.00408, 500=0.00328, 1000=0.00241, 5000=0.00173, 10000=0.0015, 25000=0.00132, 50000=0.00121, 125000=0.00118 (USD)", Radiation Hardening=No, RoHS=Yes, RoHS Compliant=Yes, Series=RMCF, Stock=5949380, Supplier=Digikey, Width=0.031inch
R_shunt1: library part "RES; SHUNT; 10mOhm; SMD; WFMA2512R0100FEA", "Res Current Sense Metal Plate 2512 0.01 Ohm 1% 3W ±110ppm/°C Molded T/R", Manufacturer=Vishay, Manufacturer Part Number=WFMA2512R0100FEA, Package=2512, Power Rating=3W, Supplier Part Number=541-10292-6-ND, Temperature Coefficient=110ppm/°C, Category="Chip SMD Resistors", ComponentLink1Description=http://www.vishay.com/docs/30387/wfm.pdf?src-supplier=Digikey, ComponentLink1URL=http://www.vishay.com/docs/30387/wfm.pdf?src-supplier=Digikey, ComponentLink2Description=http://www.farnell.com/datasheets/2793367.pdf?src-supplier=Newark, ComponentLink2URL=http://www.farnell.com/datasheets/2793367.pdf?src-supplier=Newark, ComponentLink3Description="Link Digikey", ComponentLink3URL=https://www.digikey.com/en/products/detail/vishay-dale/WFMA2512R0100FEA/9992531, ComponentLink4Description="Link CXT", ComponentLink4URL=https://linhkien.cxt.vn/3121-wfma2512r0100fea-tro-001-ohms-1-3w.html, Designer=TVBac, Pricing="1=2.85, 10=1.682, 25=1.3844, 50=1.2026, 100=1.0506, 250=0.88712, 500=0.78654, 1000=0.70625 (USD)", RoHS=Yes, Supplier=Digikey
S1: "Battery Holder, SMT, Nylon, High Temp, UL 94V-O, 1 Cell, 18650", Manufacturer="Keystone Electronics", Supplier Part Number=8033674, Category=LDO, ComponentLink1Description=https://datasheet.ciiva.com/3353/key1042-rev-eng-tds-3353207.pdf?src-supplier=Distrelec, ComponentLink1URL=https://datasheet.ciiva.com/3353/key1042-rev-eng-tds-3353207.pdf?src-supplier=Distrelec, ComponentLink2Description=https://datasheet.ciiva.com/4/1042-4715.pdf?src-supplier=Digikey, ComponentLink2URL=https://datasheet.ciiva.com/4/1042-4715.pdf?src-supplier=Digikey, Lead Free=5697LeadFree, Manufacturer Part Number=1042, Pricing="200=2.74, 600=2.68, 800=2.66, 2000=2.61, 3000=2.56 (USD)", RoHS=Yes, Stock=1600, Supplier="Future Electronics"
SW1 SW2: library part "BUT; SW; SMD; PTS636SM50JSMTRLFS", "Switch Tactile N.O. SPST Rectangular Button J-Bend 0.05A 12VDC 1.77N SMD T/R", Contact Resistance=100mR, Manufacturer="ITT C&K", Manufacturer Part Number=PTS636SM50JSMTRLFS, Supplier Part Number=CKN12319-1-ND, Category="Tactile Switches", ComponentLink1Description="Link Digikey", ComponentLink1URL=https://www.digikey.com/en/products/detail/c-k/PTS636-SM50J-SMTR-LFS/10071732, Number of Positions=2NUMBER, Pricing="1=0.21, 10=0.199, 25=0.1888, 100=0.1717, 250=0.1614, 500=0.14766 (USD)", RoHS=No, Stock=80725, Supplier=Digikey

## Via types
v1: diameter 0.5, hole 0.3, Top Layer to Bottom Layer, 17 vias
v2: diameter 0.5, hole 0.3, Top Layer to Bottom Layer, tented both sides, 14 vias

## Nets (pads, with @x,y where several pads share a name; then routed paths per layer and width w, separated by ;. In a path a pad name is that pad's centre, name@x,y a point inside that pad or via, vN(x,y) a via of type N, cw(c..) or ccw(c..) an arc to the next point about the centre after c; other vN are vias at no path point)
3V3: C1.2 C2.1 C3.1 C4.2 C5.2 C6.2 C11.1 C15.1 C16.2 C17.2 C21.2 C22.2 C23.2 D2.1 IC3.5 IC5.5 IC5.6 IC5.7 IC5.8 J1.04 J3.04 LCD1.10 M1.2 R1.2 R2.1 R5.2 R15.2 R18.1 R20.1 | length 195.4
  Top Layer w0.4: 33.223,15.576 33.254,15.545 37.998,15.545 ; LCD1.10 37.998,12.529 ; R15.2 41.199,18.066 41.199,16.967 40.742,16.51 38.964,16.51 37.998,15.545 ; C3.1 C17.2 57.366,39.066 54.165,39.066 C16.2 C15.1 50.793,39.104 50.775,39.122 M1.2 50.775,24.486 55.575,19.685 J1.04 55.575,0.889 55.245,0.559 43.817,0.559 43.524,0.852 C21.2 43.511,1.689 40.957,1.689 J3.04 40.945,3.073 37.998,6.02 37.998,12.529 ; 37.998,12.529 37.998,15.545
  Top Layer w0.5: C6.2 30.67,10.426 33.223,12.979 33.223,15.576 R2.1
  Top Layer w0.7: IC5.8 IC5.7 IC5.6 ; C22.2 12.027,47.79 12.027,45.769 IC5.6 ; R18.1 29.718,54.051 36.158,47.611 50.215,47.611 50.625,47.201 50.625,46.596 C4.2 ; R18.1@29.718,69.494 R20.1 C23.2 IC3.5 26.67,73.025 26.111,72.466 15.951,72.466 13.31,69.825 IC5.5 IC5.6
BAT+: D3.2 IC2.5 J4.01 J4.03 R16.1 R_shunt1.1 | length 29.3
  Top Layer w1: J4.01 30.988,85.784 30.402,85.198 ; D3.2 33.503,80.743 ; J4.03 33.001,85.198 30.402,85.198 ; IC2.5@37.281,80.743 IC2.5 33.503,80.743 ; 30.402,85.198 29.447,85.198 29.137,84.888 29.137,80.743 33.503,80.743
DS18B20: J3.03 M1.19 R15.1 | length 33.9
  Top Layer w0.2: M1.19 34.298,30.455 v1(36.601,30.455) ; v1(38.786,18.11) 39.682,18.11 R15.1 39.707,18.154 39.7,18.161 R15.1@39.666,18.126
  Bottom Layer w0.2: v1(36.601,30.455) 38.786,28.27 v1(38.786,18.11) 39.591,17.305 39.591,2.862 J3.03
En_charge: M1.10 R26.1 | length 2.6
  Top Layer w0.2: M1.10 40.615,39.834 R26.1
ESP-D_N: J2.A7 J2.B7 M1.13 | length 68.8
  Top Layer w0.2: v2(36.489,35.611) 36.489,36.545 36.505,36.561 36.505,37.013 M1.13 ; J2.A7 49.382,84.768 ; v2(50.063,86.208) 50.006,86.265 49.837,86.265 49.796,86.306 49.563,86.306 49.382,86.124 49.382,84.768 ; J2.B7 50.382,84.651 50.264,84.768 49.382,84.768
  Bottom Layer w0.2: v2(36.489,35.611) 36.432,35.668 36.432,35.837 36.391,35.878 36.391,59.155 36.397,59.16 36.397,82.701 40.001,86.306 49.796,86.306
ESP-D_P: J2.A6 J2.B6 M1.14 | length 70.8
  Top Layer w0.2: M1.14 35.835,37.013 35.835,36.55 35.839,36.545 v2(35.839,35.611) ; J2.A6 49.833,83.775 49.833,83.197 49.634,82.999 49.129,82.999 48.931,83.197 48.931,83.775 J2.B6 48.928,83.87 48.928,86.312 49.375,86.76 49.796,86.76 49.837,86.8 50.006,86.8 v2(50.063,86.858)
  Bottom Layer w0.2: v2(35.839,35.611) 35.897,35.668 35.897,35.837 35.937,35.878 35.937,59.343 35.943,59.348 35.943,82.889 39.813,86.76 49.796,86.76
ESP-RX0: J1.02 M1.36 | length 19.5
  Top Layer w0.6: M1.36 46.965,11.074 50.495,7.544 J1.02
ESP-TX0: J1.03 M1.37 | length 20
  Top Layer w0.6: M1.37 48.235,12.116 53.035,7.315 J1.03
GND: C1.1 C2.2 C3.2 C4.1 C5.1 C6.1 C7.1 C8.1 C11.2 C12.1 C13.1 C14.1 C15.2 C16.1 C17.1 C21.1 C22.1 C23.1 IC1.2 IC2.3 IC2.9 IC3.1 IC3.2 IC3.6 IC4.1 IC4.2 IC4.3 IC4.4 IC5.4 J1.01 J2.A1B12 J2.B1A12 J2.SHIELD J3.01 L2.2 LCD1.1 LCD1.2 LCD1.8 LCD1.13 LCD1.14 LCD1.15 LCD1.16 LCD1.17 M1.1 M1.40 M1.41 M1.42 M1.43 M1.44 M1.45 M1.46 M1.47 M1.48 M1.49 Q1.2 Q3.2 R4.2 R9.2 R11.2 R12.1 R13.2 R14.2 R19.1 R24.2 R28.1 SW1.1 SW2.1
  other v1: 40.64,15.24
LCD-BGR: LCD1.12 M1.32 | length 7.5
  Top Layer w0.5: LCD1.12 41.947,13.929 42.24,14.222 42.24,18.898 42.035,19.103 42.035,19.663 M1.32
LCD-CS: LCD1.7 M1.33 | length 11.4
  Top Layer w0.4: LCD1.7 42.355,10.429 43.153,11.228 M1.33 M1.33
LCD-DC: LCD1.5 M1.35 | length 14.6
  Top Layer w0.4: LCD1.5 40.64,9.017 43.485,9.017 45.695,11.227 M1.35
LCD-MOSI: LCD1.3 M1.39 | length 19.5
  Top Layer w0.4: LCD1.3 v1@45.932,7.629
  Top Layer w0.5: v1@45.932,7.629 v1(45.949,7.645) ; v1(50.775,17.831) M1.39
  Bottom Layer w0.5: v1(45.949,7.645) 50.775,12.471 v1(50.775,17.831)
LCD-RST: LCD1.6 M1.34 | length 12.9
  Top Layer w0.4: LCD1.6 40.629,9.728 42.723,9.728 44.425,11.43 M1.34
LCD-SCK: LCD1.4 M1.38 | length 17.5
  Top Layer w0.4: LCD1.4 v1@44.575,8.329
  Top Layer w0.5: v1@44.575,8.329 v1(44.577,8.331) ; v1(49.454,17.755) 49.454,19.762 M1.38
  Bottom Layer w0.5: v1(44.577,8.331) 49.454,13.208 v1(49.454,17.755)
LOAD: M1.9 Q3.1 R19.2 | length 43.9
  Top Layer w0.2: M1.9 v1(41.885,38.684) ; v1(54.127,70.51) 54.127,72.92 Q3.1 55.473,72.949 55.797,72.626 R19.2
  Bottom Layer w0.2: v1(41.885,38.684) 54.127,50.927 v1(54.127,70.51)
NetC7_2: C7.2 M1.3 R1.1 SW1.2 | length 7.3
  Top Layer w0.2: SW1.2 C7.2 R1.1 ; R1.1@49.301,39.599 49.301,37.516 M1.3
NetC8_2: C8.2 M1.27 R2.2 SW2.2 | length 7
  Top Layer w0.15: M1.27 35.599,19.748 C8.2
  Top Layer w0.6: SW2.2 R2.2 M1.27
NetC9_1: C9.1 IC1.1 L1.2 | length 12
  Top Layer w0.5: IC1.1 46.446,60.391 46.939,60.884 51.181,60.884 52.032,60.033 L1.2 52.386,58.447 53.088,57.744 C9.1
NetC9_2: C9.2 D2.2 L2.1 | length 7.8
  Top Layer w1.21: L2.1 47.815,55.302 48.162,55.649 50.188,55.649 C9.2 50.188,54.002 50.774,53.416 D2.2
NetC19_1: C19.1 IC3.8 R16.2 | length 10.8
  Top Layer w0.2: IC3.8 IC3.8@22.873,74.384 ; v1@22.873,76.289 v1(22.885,76.302)
  Top Layer w0.5: IC3.8@22.873,74.384 v1@22.873,76.289
  Top Layer w0.6: v1(27.127,77.064) 27.127,78.774 26.927,78.974 26.914,78.974 C19.1 R16.2
  Bottom Layer w0.5: v1(22.885,76.302) 26.365,76.302 v1(27.127,77.064)
NetC19_2: C19.2 IC3.7 R17.2 | length 7.4
  Top Layer w0.5: R17.2 C19.2 25.414,77.661 24.13,76.378 IC3.7
NetC20_1: C20.1 IC4.5 IC4.7 IC4.8 IC4.9 S1.N
NetC20_2: C20.2 IC4.6 R25.1 | length 4.1
  Top Layer w0.15: IC4.6 R25.1
NetD4_1: D4.1 D5.1 IC2.4 R3.2 R8.1 R10.2 | length 23.6
  Top Layer w0.2: R10.2 v2(41.157,73.263) 42.105,73.263 R8.1
  Top Layer w1: IC2.4@40.97,80.732 R3.2@44.257,80.732 ; IC2.4@41.617,80.732 R3.2@44.257,80.732 ; IC2.4@41.617,80.943 D5.1 D4.1 ; R3.2@44.257,80.732 v2(42.613,80.732) R3.2@44.257,80.732
  Bottom Layer w0.2: v2(41.157,73.263) 42.496,73.263 42.613,73.38 v2(42.613,80.732)
NetD4_2: D4.2 R6.1 | length 1.6
  Top Layer w0.9: R6.1 D4.2
NetD5_2: D5.2 R7.1 | length 1.6
  Top Layer w0.9: R7.1 D5.2
NetIC1_3: IC1.3 R5.1 R12.2 | length 10
  Top Layer w0.2: IC1.3 48.387,59.26 v2(48.387,58.268) ; R12.2@49.075,51.689 50.735,51.689 R5.1
  Bottom Layer w0.2: v2(48.387,58.268) 49.962,56.693 49.962,51.74 v2(49.911,51.689)
NetIC2_1: IC2.1 R8.2 R9.1 R11.1 | length 6.6
  Top Layer w0.6: IC2.1 42.103,76.933 42.103,74.826 R8.2 R11.1 R9.1
NetIC2_2: IC2.2 R14.1 | length 2.5
  Top Layer w0.5: IC2.2 R14.1
NetIC2_6: IC2.6 R7.2 | length 6.6
  Top Layer w0.2: v2@35.154,79.477 v2@35.156,79.475 ; IC2.6@36.676,79.475 IC2.6
  Top Layer w0.4: v2(35.154,82.855) 35.181,82.855 35.206,82.88 36.761,82.88 R7.2 ; v2@35.156,79.475 IC2.6@36.676,79.475
  Bottom Layer w0.2: v2@35.052,82.804 35.066,82.804 v2@35.154,82.716
  Bottom Layer w0.4: v2@35.154,79.477 v2@35.154,82.716
  other v2: 35.154,79.473
NetIC2_7: IC2.7 R6.2 | length 10.9
  Top Layer w0.4: v2(34.468,78.203) IC2.7 ; v2(34.468,84.531) R6.2
  Bottom Layer w0.4: v2@34.468,78.207 v2(34.468,84.531)
NetIC2_8: IC2.8 Q1.3 R10.1 | length 5.7
  Top Layer w0.6: IC2.8 Q1.3 R10.1
NetJ2_A5: J2.A5 R13.1 | length 6.7
  Top Layer w0.15: J2.A5 v2(50.882,85.395) 52.376,86.889 R13.1@55.347,86.889
NetJ2_B5: J2.B5 R4.1 | length 6.9
  Top Layer w0.15: R4.1 43.891,87.097 44.475,86.512 46.764,86.512 v2(47.882,85.395) J2.B5
NetJ4_02: J4.02 J4.04 Q3.3 | length 29.8
  Top Layer w1: J4.04 40.386,88.265 43.586,85.065 43.586,83.287 v1(43.536,83.236)
  Bottom Layer w1: J4.02 33.528,88.165 33.713,87.98 33.713,87.978 35.705,85.987 36.533,85.987 38.423,87.877 38.423,87.98 38.608,88.165 J4.04 ; v1(43.536,83.236) 43.536,82.779 46.533,79.781 56.286,79.781 v1(56.312,79.807)
NetLCD1_11: LCD1.11 R24.1 | length 10.9
  Top Layer w0.5: R24.1 29.818,13.259 v1(31.217,13.259) ; v1(39.091,13.233) 39.095,13.229 LCD1.11
  Bottom Layer w0.5: v1(31.217,13.259) 39.065,13.259 v1(39.091,13.233)
NetQ1_1: Q1.1 R26.2 R28.2 | length 32.9
  Top Layer w0.2: Q1.1 R28.2 35.728,69.428 38.278,66.878 v1(38.278,66.853) ; v1(40.64,43.307) 40.64,41.471 R26.2
  Bottom Layer w0.2: v1(38.278,66.853) 38.278,45.669 v1(40.64,43.307)
NetR17_1: R17.1 R25.2 R_shunt1.2 S1.P | length 94.4
  Top Layer w0.5: S1.P 11.43,76.327 4.064,68.961 4.064,15.85 6.492,13.422 R25.2@25.629,13.422
SCL: IC3.4 IC5.2 M1.11 R18.2 | length 75.4
  Top Layer w0.4: R18.2 IC3.4 26.67,50.317 19.075,42.723 10.887,42.723 10.77,42.606 IC5.2 10.77,38.684 11.405,38.049 19.456,38.049 21.565,40.157 38.049,40.157 39.345,38.862 M1.11
SDA: IC3.3 IC5.1 M1.12 R20.2 | length 77.9
  Top Layer w0.4: R20.2 25.756,71.222 25.4,70.866 25.4,50.698 18.46,43.759 10.459,43.759 9.5,42.799 IC5.1 9.5,38.659 10.897,37.262 20.066,37.262 22.022,39.218 37.44,39.218 38.075,38.583 M1.12
VBUS: D1.2 J2.A4B9 J2.B4A9 R3.1 | length 20.7
  Top Layer w0.59: J2.B4A9 47.232,80.874 52.032,80.874 ; D1.2 52.032,80.874 ; J2.A4B9 52.032,80.874
VIN: C12.2 C13.2 C14.2 D1.1 D3.1 IC1.4 IC1.5 L1.1
pads on no net: IC1.6 IC5.3 J2.A8 J2.B8 J3.02 LCD1.9 M1.4 M1.5 M1.6 M1.7 M1.8 M1.15 M1.16 M1.17 M1.18 M1.20 M1.21 M1.22 M1.23 M1.24 M1.25 M1.26 M1.28 M1.29 M1.30 M1.31 S1.

## Polygon pours and split planes (outlines as drawn)
3V3 on Top Layer "3V3_L01_P008" (solid, pour order 8): 50.269,40.005 50.267,36.322 50.269,36.32 51.238,36.32 51.238,38.411 51.41,38.583 51.452,38.54 59.774,38.54 59.774,39.921 59.69,40.005
NetC20_1 on Top Layer "NETC20_1_L01_P001" (solid, pour order 1): 4.928,0.787 22.25,0.787 22.25,3.861 27.432,3.861 27.432,10.947 4.928,10.947
3V3 on Top Layer "3V3_L01_P003" (solid, pour order 3): 50.063,35.839 51.486,35.839 51.486,45.796 59.055,45.796 59.055,54.737 55.194,54.737 55.194,50.952 50.063,50.952
VIN on Top Layer "VIN_L01_P002" (solid, pour order 2): 32.029,61.366 55.042,61.366 55.042,69.494 50.038,69.494 50.038,65.405 34.773,65.405 34.773,72.796 32.029,72.796
NetR17_1 on Top Layer "NETR17_1_L01_P000" (solid, pour order 0): 7.417,89.256 7.417,80.01 24.79,80.01 24.79,89.256
GND on Bottom Layer "GND_L02_P007" (solid, pour order 7): 0,-0.178 0.279,0.102 60.02,0.102 60.02,89.84 59.893,89.967 -0.127,89.967

## Keep-outs
Keep-Out Layer:
  the board outline again, w0.2